# Altium PCB LED_Base_V2.PcbDoc
Units mil, origin at the board's own origin, x right, y up, seen from the top; angles counter-clockwise.
Board outline 1181.1 x 1181.1 mil, 2 copper layers (Top Layer, Bottom Layer); 15 components, 14 nets, 54 pads, 16 vias.
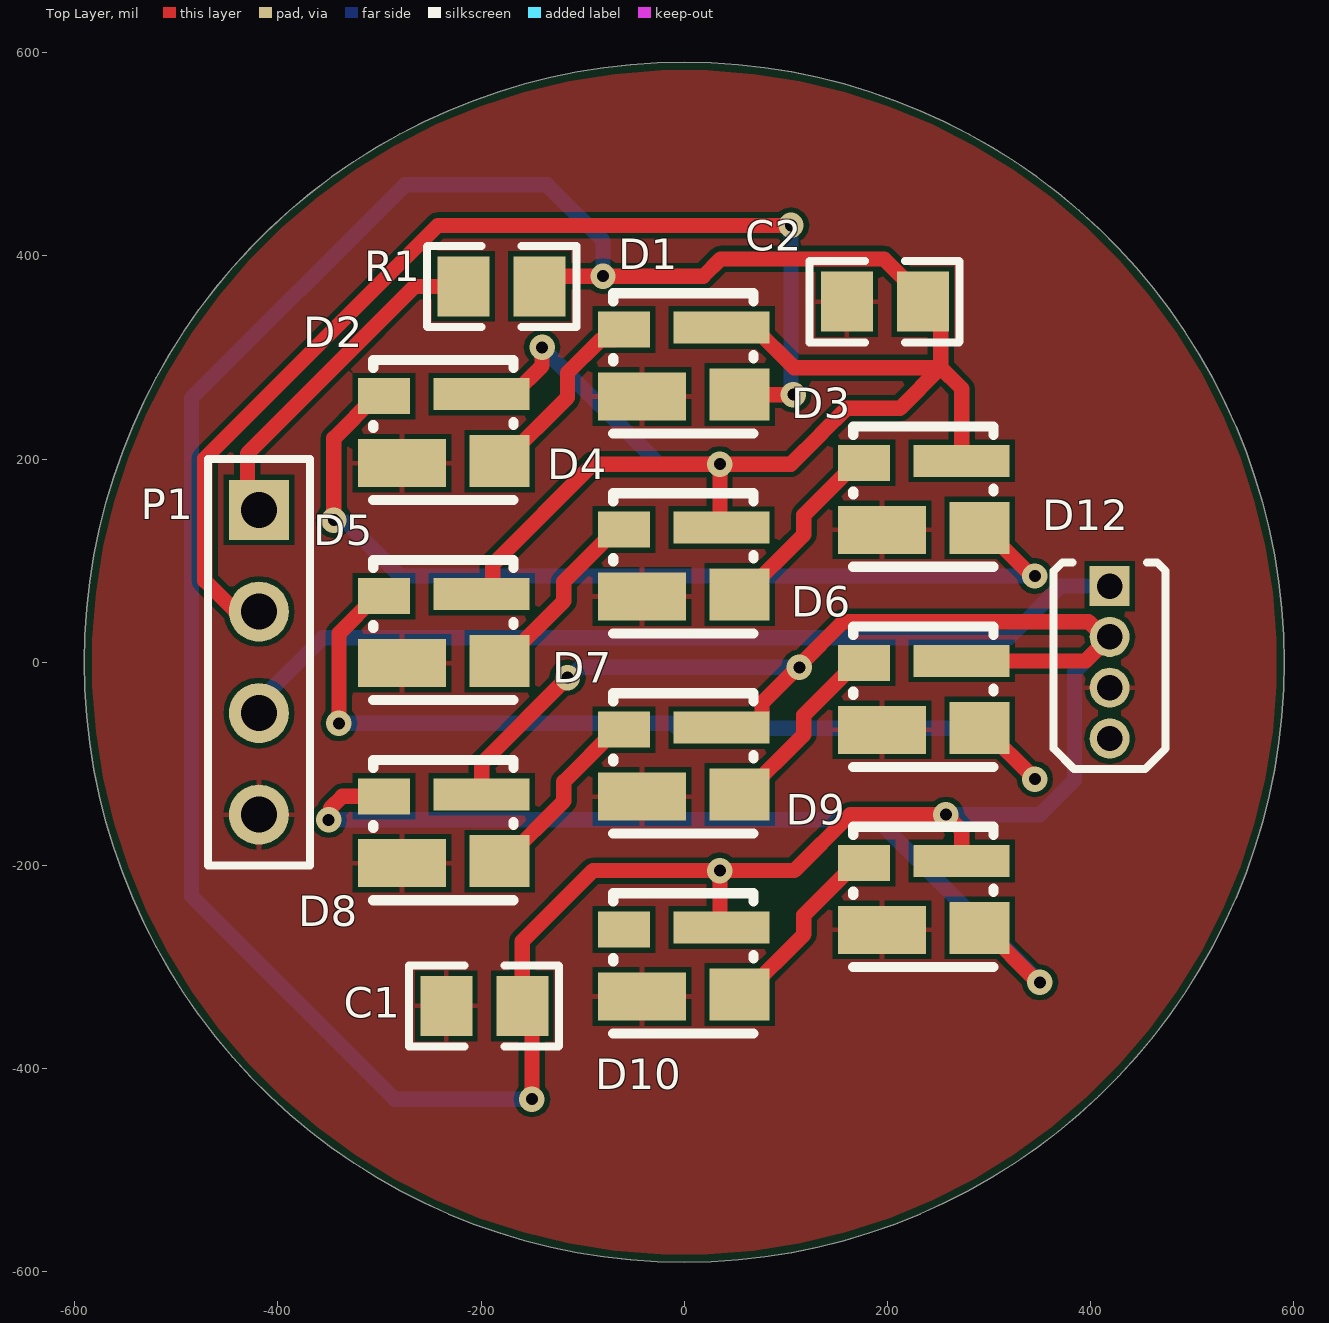
[diagram p0: Top Layer view]
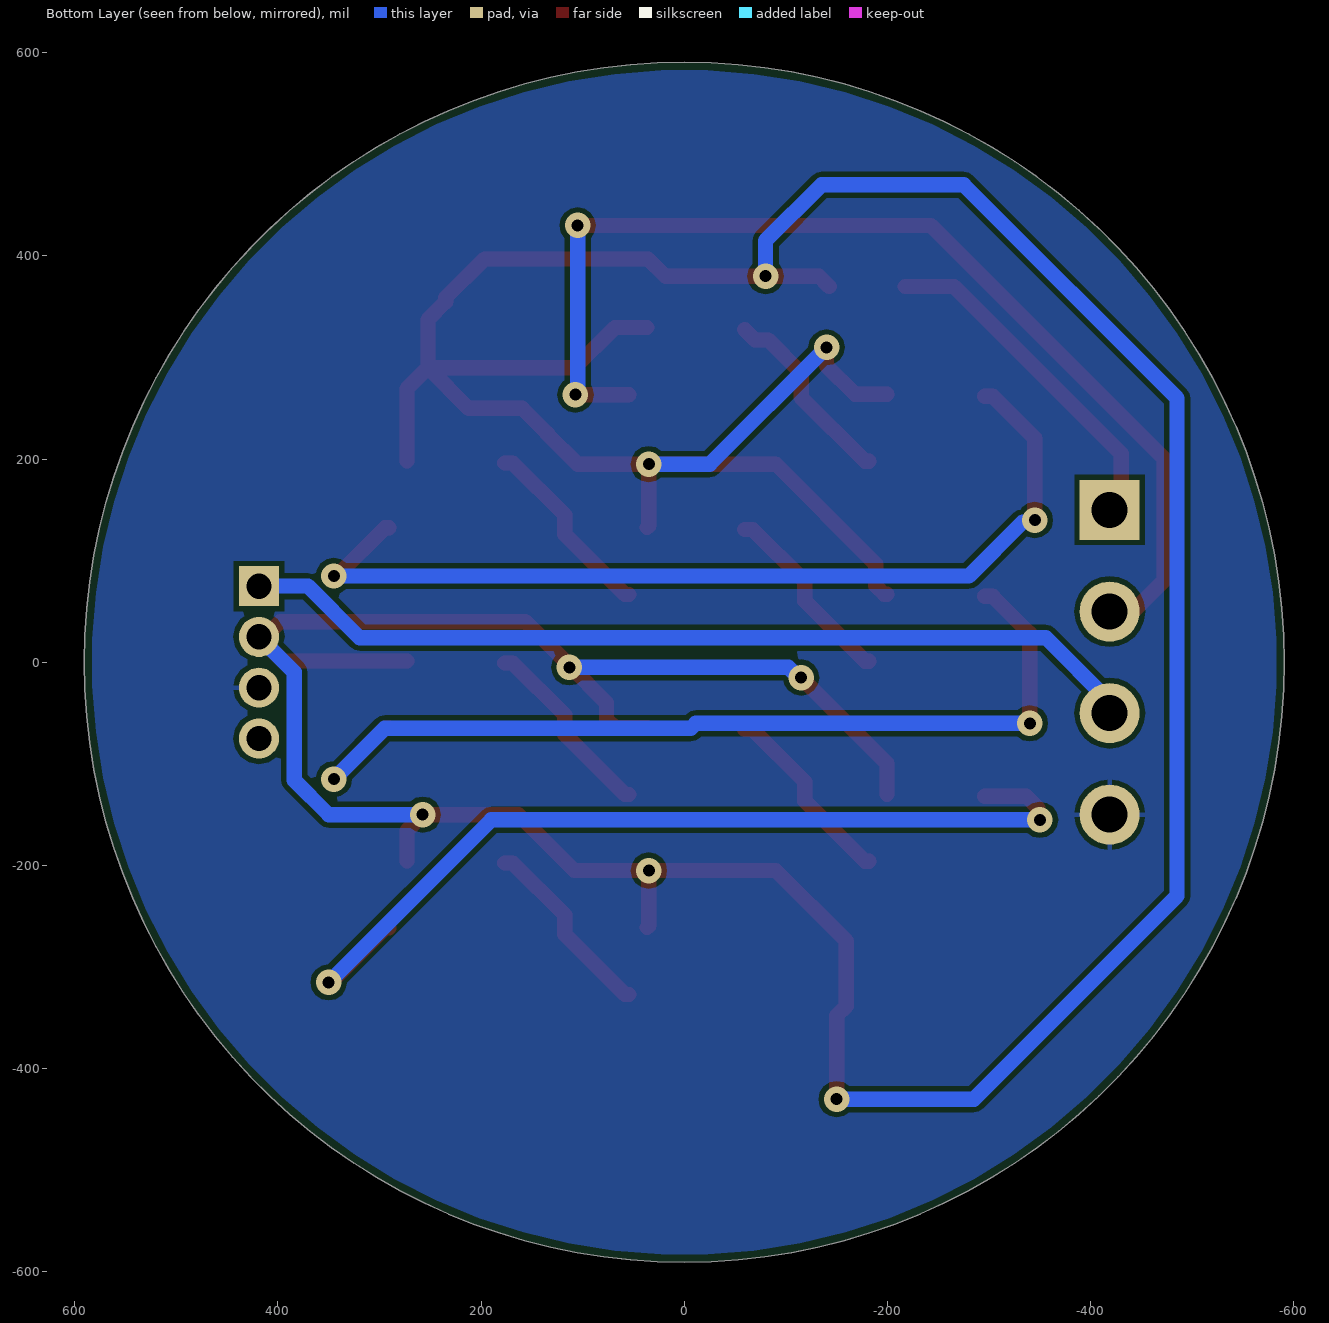
[diagram p1: Bottom Layer view, seen from below]
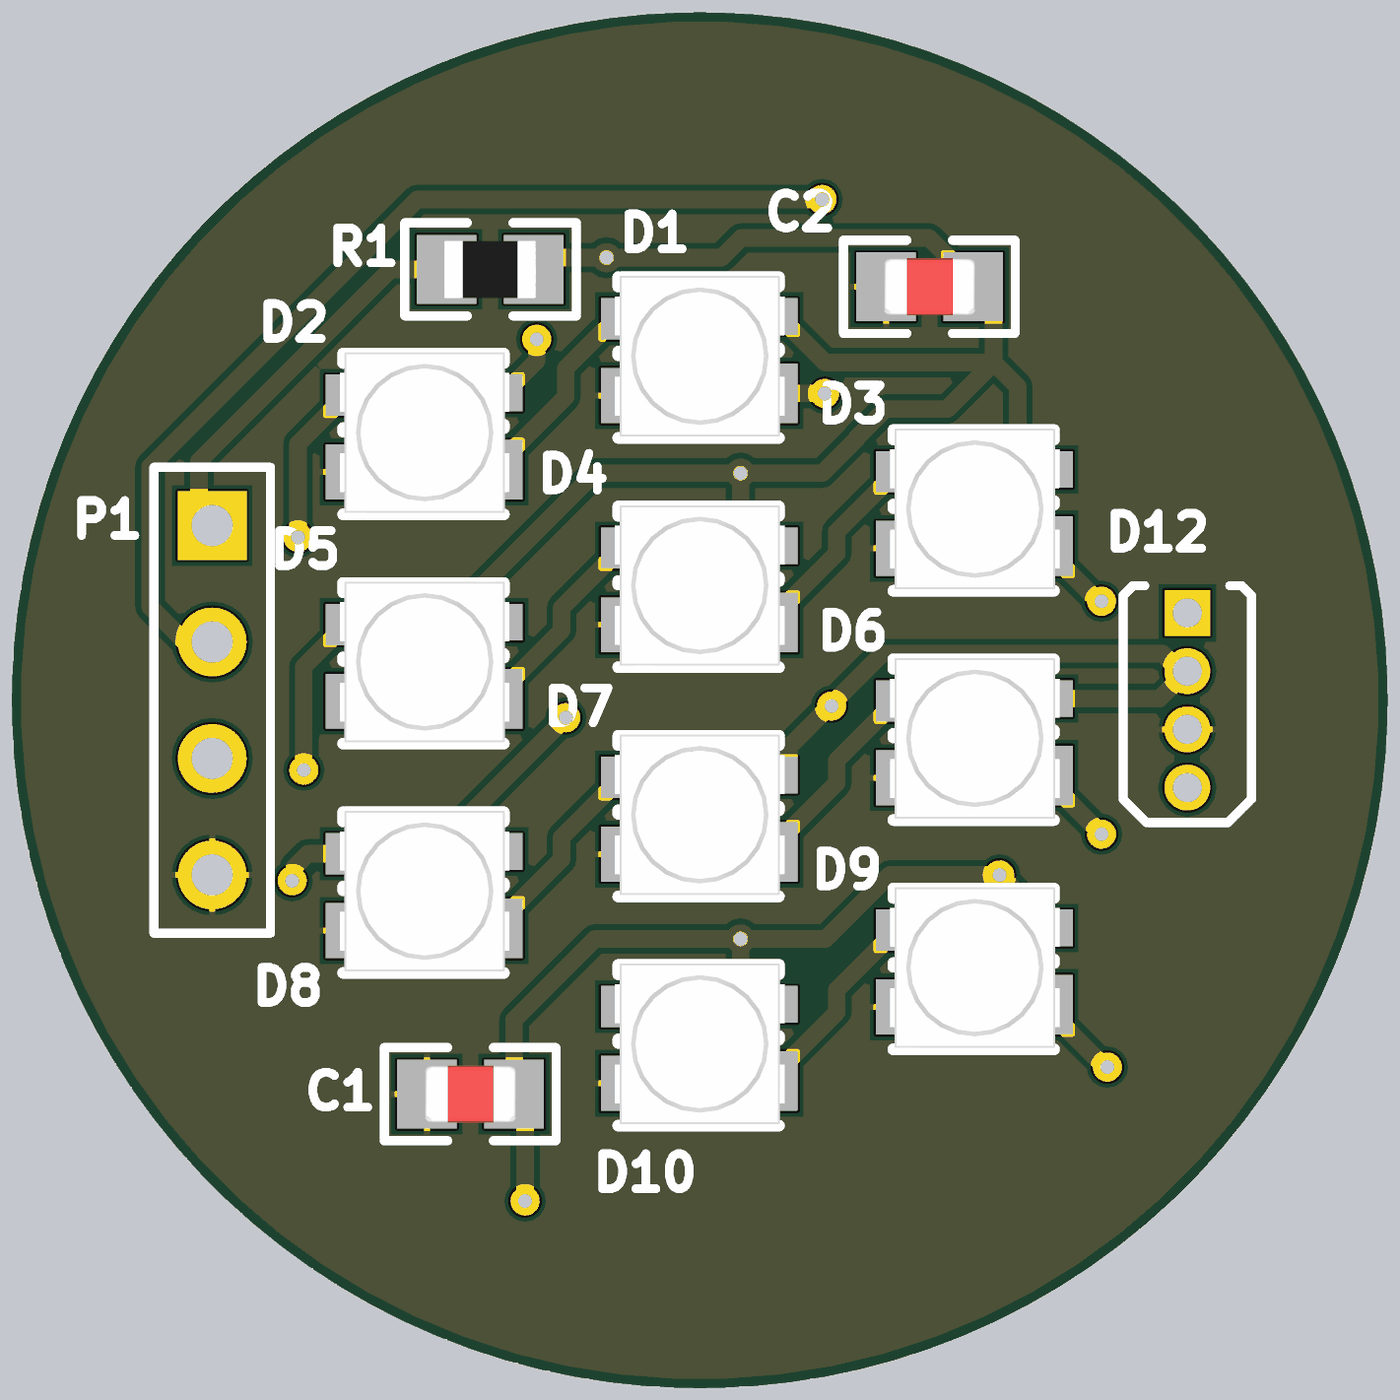
[diagram p2: 3D render of the assembled board from above, using the file's embedded part models]

## Layer stack, top to bottom
Top Solder: solder mask 0.4, Solder Resist, Dk 3.5
Top Layer: signal copper 1.4
Dielectric 1: dielectric 12.6, FR-4, Dk 4.8
Bottom Layer: signal copper 1.4
Bottom Solder: solder mask 0.4, Solder Resist, Dk 3.5

## Board outline
-590.55,0 ccw(c0,0) 0,-590.55 ccw(c0,0) 590.55,0 ccw(c0,0) 0,590.55 ccw(c0,0)

## Design rules (kind name [scope] priority, off if disabled: settings)
BoardOutlineClearance [All] p1: gap=7.87 ignorepadtopadclearanceinfootprint=FALSE
Clearance [All] p1: gap=5 ignorepadtopadclearanceinfootprint=TRUE except(10: Arc-Hole Track-Hole SMDPad-Hole THPad-Hole Via-Hole Fill-Hole Poly-Hole Region-Hole Text-Hole)
ComponentClearance [All] p1: gap=5 collisioncheckmode=3 verticalgap=5 showdistances=TRUE
DiffPairsRouting [All] p1: maxlimit=10 minlimit=5 mostfreqgap=5 toplayer_minwidth=5 toplayer_maxwidth=1000 toplayer_prefwidth=5 bottomlayer_minwidth=5 bottomlayer_maxwidth=1000 bottomlayer_prefwidth=5 maxuncoupledlength=500
Height [All] p1: minheight=0 maxheight=71497.94 prefheight=500
HoleSize [All] p1: absolutevalues=TRUE maxlimit=248.03 minlimit=11.81 maxpercent=80.000 minpercent=20.000
HoleToHoleClearance [All] p1: gap=10 allowstackedmicrovias=FALSE
MinimumAnnularRing [All] p1: minimumring=6
MinimumSolderMaskSliver [All] p1: minsoldermaskwidth=6
PlaneClearance [All] p1: clearance=5
PlaneConnect PlaneConnectPowerPads [InPadClass('PowerPads')] p1: planeconnectstyle=Direct reliefexpansion=20 reliefentries=4 reliefconductorwidth=10 reliefairgap=10
PlaneConnect [All] p2: pad.planeconnectstyle=Relief pad.reliefexpansion=11.81 pad.reliefentries=4 pad.reliefconductorwidth=5 pad.reliefairgap=5 via.planeconnectstyle=Direct via.reliefexpansion=11.81 via.reliefentries=4 via.reliefconductorwidth=5 via.reliefairgap=5
PolygonConnect PolygonConnectPowerPads [All vs (InPadClass('PowerPads'))] p1: connectstyle=Direct reliefconductorwidth=10 reliefentries=4 polygonreliefangle="90 Angle" airgapwidth=10
PolygonConnect [All] p2: thpad.connectstyle=Relief thpad.reliefconductorwidth=5 thpad.reliefentries=4 thpad.polygonreliefangle="90 Angle" thpad.airgapwidth=5 smdpad.connectstyle=Relief smdpad.reliefconductorwidth=5 smdpad.reliefentries=4 smdpad.polygonreliefangle="90 Angle" smdpad.airgapwidth=5 via.connectstyle=Direct via.reliefconductorwidth=5 via.reliefentries=4 via.polygonreliefangle="90 Angle" via.airgapwidth=5
RoomDefinition Sheet1 [InComponentClass('Sheet1')] p1: confinementstyle=ConfineIn formatcopy=TRUE lockcomponents=FALSE outline -500,-495 550,-495 550,540 -500,540
RoutingVias [All] p1: holewidth=11.81 width=23.62 viastyle="Through Hole" minholewidth=11.81 minwidth=23.62 maxholewidth=23.62 maxwidth=259.84
SilkToSilkClearance [All] p1: silktosilkclearance=5
SilkToSolderMaskClearance [IsPad] p1: minsilkscreentomaskgap=5 clearancetoexposedcopper=TRUE
SolderMaskExpansion [All] p1: expansion=2 istentingtop=FALSE
UnRoutedNet [All] p1: checkbadconnections=TRUE
Width Width_10mil [All] p1: maxlimit=1000 minlimit=10 preferedwidth=10 minimp=50.000000 maximp=50.000000 favimp=50.000000
Width Width_6mil [All] p2: maxlimit=1000 minlimit=6 preferedwidth=6 minimp=50.000000 maximp=50.000000 favimp=50.000000
Width Power_20mil [All] p3: maxlimit=1000 minlimit=20 preferedwidth=20 minimp=50.000000 maximp=50.000000 favimp=50.000000
Width Power_12mil [All] p4: maxlimit=1000 minlimit=12 preferedwidth=12 minimp=50.000000 maximp=50.000000 favimp=50.000000
Width Width_5mil [All] p5: maxlimit=1000 minlimit=5 preferedwidth=5 minimp=50.000000 maximp=50.000000 favimp=50.000000
Width [All] p6: maxlimit=10 minlimit=10 preferedwidth=10
19 further rules are at their usual default settings.

## Classes and differential pairs
component class Sheet2: C3 J1 J2 P2 P3

## Components (designator, comment, footprint, x,y, rotation, side; value= is the part's Value field where it differs from the comment)
C1 "47uF" 0805C -196.85,-338.23 r180 top
C2 "47uF" 0805C 197.4,355 r180 top
D1 "Diode_SK6812MINI" SK6812MINI 0,295.28 r0 top
D2 "Diode_SK6812MINI" SK6812MINI -236.22,229.65 r0 top
D3 "Diode_SK6812MINI" SK6812MINI 236.22,164.02 r0 top
D4 "Diode_SK6812MINI" SK6812MINI 0,98.39 r0 top
D5 "Diode_SK6812MINI" SK6812MINI -236.22,32.76 r0 top
D6 "Diode_SK6812MINI" SK6812MINI 236.22,-32.87 r0 top
D7 "Diode_SK6812MINI" SK6812MINI 0,-98.5 r0 top
D8 "Diode_SK6812MINI" SK6812MINI -236.22,-164.13 r0 top
D9 "Diode_SK6812MINI" SK6812MINI 236.22,-229.76 r0 top
D10 "Diode_SK6812MINI" SK6812MINI 0,-295.28 r0 top
D12 "WS2812_Through_Hole_Thin" WS2812_THROUGH_HOLE_SMALLER 418.66,0 r0 top
P1 "Header 4" HDR1X4 -418.66,150 r270 top
R1 "470" 0805 -180,370 r0 top

## Footprints (in the part's own frame and the unit in brackets; to place one, negate y for a bottom-side part, rotate by r counter-clockwise, add the part's x,y. Pads: shape width x height; smd on the part's side, far side on the other; paste and mask are expansions set on the pad)
0805 [mm] "0805 Footprint"
  rect 1.3x1.5 smd: 1(-0.95,0) 2(0.95,0)
  silkscreen extent -1.87,-1.02 1.88,1.02, body extent -1,-0.63 1,0.62, height 0.5
0805C [mm] "0805 Footprint"
  rect 1.3x1.5 smd: 1(-0.95,0) 2(0.95,0)
  silkscreen extent -1.87,-1.02 1.88,1.02, body extent -1,-0.62 1,0.63, height 0.78
HDR1X4 [mm] "Connector; Header; 4 Position"
  rect 1.5x1.5 hole 0.9: 1(0,0)
  round 1.5 hole 0.9: 2(2.54,0) 3(5.08,0) 4(7.62,0)
  silkscreen extent -1.27,-1.27 8.89,1.27
SK6812MINI [mm] "SMD LED 3535"
  rect 1.3x0.9 smd: 1(-1.509,0.82)
  rect 2.2x1.2 smd: 2(-1.059,-0.854)
  rect 1.5x1.3 smd: 3(1.385,-0.804)
  rect 2.4x0.8 smd: 4(0.935,0.87)
  silkscreen extent -1.78,-1.78 1.73,1.73, body extent -1.85,-1.75 1.85,1.75, height 1.1
WS2812_THROUGH_HOLE_SMALLER [mm] "THD, 4-Leads, Dia 5.9mm, Pitch 1.27mm"
  rect 1x1 hole 0.635 paste+0: 1(0,1.905)
  round 1 hole 0.635 paste+0: 2(0,0.635) 3(0,-0.635) 4(0,-1.905)
  silkscreen extent -1.4,-2.67 1.4,2.5

## Part data
C1 C2: library part C, "Capacitor", Reviewed by="RM - 2018/08/05", Revision="July-2002: Re-released for DXP Platform."
D1 D2 D3 D4 D5 D6 D7 D8 D9 D10: "SMD LED 3535", Manufacturer=Adafruit, Package=SMT_LED_5MM0, Part Number=SK6812MINI, Temperature="-40°C to +85°C", Temperature Range High=+85°C, Temperature Range Low=-40°C, ComponentLink1Description=Upverter, ComponentLink1URL=https://upverter.com/upn/revision/c89e73b2d25df682/, ComponentLink2Description=Datasheet, ComponentLink2URL=https://cdn-shop.adafruit.com/product-files/1138/SK6812+LED+datasheet+.pdf, helpURL=https://upverter.com/upn/revision/c89e73b2d25df682/, Ipc Land Pattern Name=SOIC320P540X160-4, Lead Free=yes, RoHS=TRUE, Supplier 1=Digi-Key, Supplier 2=Mouser
D12: "WS2812 Through Hole LED"
P1: "Header, 4-Pin", LatestRevisionDate=17-Jul-2002, LatestRevisionNote="Re-released for DXP Platform.", Publisher="Altium Limited"
R1: library part R, "Resistor", Reviewed by="RM - 2018/08/05"

## Via types
v1: diameter 25, hole 11.81, Top Layer to Bottom Layer, 13 vias
v2: diameter 25, hole 11.81, Top Layer to Bottom Layer, tented both sides, 3 vias

## Nets (pads, with @x,y where several pads share a name; then routed paths per layer and width w, separated by ;. In a path a pad name is that pad's centre, name@x,y a point inside that pad or via, vN(x,y) a via of type N, cw(c..) or ccw(c..) an arc to the next point about the centre after c; other vN are vias at no path point)
DIN_SK6812: D1.3 P1.2 | length 1055
  Top Layer w15: P1.2@-442.03,50.33 -472.03,80.33 -472.03,200.64 -242.67,430 v1(105,430) ; D1.3 54.68,263.47 v1(107.22,263.47)
  Bottom Layer w15: v1(105,430) 105,265.69 v1(107.22,263.47)
DIN_WS2812: D12.1 P1.3 | length 895.7
  Bottom Layer w15: P1.3 -418.66,-38.66 -355.79,24.21 319.57,24.21 370.36,75 D12.1
DOUT1: D1.1 D2.3 | length 190.2
  Top Layer w15: D2.3 -177.76,197.99 -115,260.75 -115,285 -82.66,317.34 -69.63,317.34 D1.1
DOUT2: D2.1 D3.3 | length 933.6
  Top Layer w15: v1(-345,140) -345,220.43 -303.5,261.93 D2.1 ; D3.3 294.69,132.36 340.4,86.65 343.35,86.65 v1(345,85)
  Bottom Layer w15: v1(-345,140) -343.09,138.09 -333.09,138.09 -280,85 v1(345,85)
DOUT3: D3.1 D4.3 | length 187.1
  Top Layer w15: D4.3 58.46,66.73 117.64,125.91 117.64,145 168.94,196.3 D3.1
DOUT4: D4.1 D5.3 | length 187.1
  Top Layer w15: D5.3 -177.76,1.1 -118.58,60.28 -118.58,79.37 -67.28,130.67 D4.1
DOUT5: D5.1 D6.3 | length 931.1
  Top Layer w15: v1(-340,-60) -340,28.54 -303.5,65.04 D5.1 ; D6.3 294.69,-64.53 345,-114.84 v1(345,-115)
  Bottom Layer w15: v1(-340,-60) -11.33,-60 -6.33,-65 295,-65 v1(345,-115)
DOUT6: D6.1 D7.3 | length 187.1
  Top Layer w15: D7.3 58.46,-130.16 117.64,-70.98 117.64,-51.89 168.94,-0.59 D6.1
DOUT7: D7.1 D8.3 | length 187.1
  Top Layer w15: D8.3 -177.76,-195.79 -118.58,-136.61 -118.58,-117.52 -67.28,-66.22 D7.1
DOUT8: D8.1 D9.3 | length 917.4
  Top Layer w15: v1(-350,-155) -348.09,-153.09 -348.09,-143.32 -336.62,-131.85 D8.1 ; D9.3 294.69,-261.42 348.27,-315 v1(350,-315)
  Bottom Layer w15: v1(-350,-155) 190,-155 v1(350,-315)
DOUT9: D9.1 D10.3 | length 187
  Top Layer w15: D10.3 58.46,-326.93 117.64,-267.76 117.64,-248.78 168.94,-197.48 D9.1
GND: C1.2 C2.2 D1.2 D2.2 D3.2 D4.2 D5.2 D6.2 D7.2 D8.2 D9.2 D10.2 D12.3 P1.4
NetP1_1: P1.1 R1.1 | length 321.2
  Top Layer w15: P1.1@-430,165 -430,205.49 -265.49,370 R1.1
VDD: C1.1 C2.1 D1.4 D2.4 D3.4 D4.4 D5.4 D6.4 D7.4 D8.4 D9.4 D10.4 D12.2 R1.2 | length 5214.8
  Top Layer w15: D8.4 -199.41,-99.41 v1(-115,-15) ; D5.4 -196.78,67.01 -188.53,75.26 -188.53,96.47 -90,195 v2(35,195) ; D2.4 -167.91,263.9 -140,291.81 v1(-140,310) ; v1(-150,-430) -150,-347.68 C1.1 -159.45,-274.45 -90,-205 v2(35,-205) ; R1.2 -132.6,380 v2(-80,380) 18.6,380 35.63,397.03 196.71,397.03 234.8,358.94 C2.1 252.34,337.46 252.34,290 ; D10.4 35,-259.21 v2(35,-205) ; D7.4 68.31,-64.25 76.56,-56 76.56,-39.86 v1@113.21,-3.21 ; D4.4 35,134.45 v2(35,195) ; D1.4 68.31,329.53 107.83,290 252.34,290 ; v1(113.21,-4.95) v1@113.21,-3.21 ; D9.4 273.03,-165.52 v1(257.51,-150) 163.31,-150 108.31,-205 v2(35,-205) ; D6.4 395.04,1.38 D12.2 412.69,25 397.69,40 156.42,40 v1@113.21,-3.21 ; D3.4 273.03,269.31 252.34,290 ; v2(35,195) 105,195 135,225 135,225.47 159.53,250 212.34,250 252.34,290
  Bottom Layer w15: v1(-150,-430) -285,-430 -485,-230 -485,260 -275,470 -135,470 -80,415 v2(-80,380) ; v1(-140,310) -25,195 v2(35,195) ; v1(-115,-15) -112.67,-15 -102.62,-4.95 v1(113.21,-4.95) ; v1(257.51,-150) 350,-150 384.01,-115.99 384.01,-9.65 D12.2
pads on no net: D10.1 D12.4

## Polygon pours and split planes (outlines as drawn)
GND on Top Layer "GND_L01_P010" (solid, pour order 10): -590.55,0 ccw(c0,0) 0,-590.55 ccw(c0,0) 590.55,0 ccw(c0,0) 0,590.55 ccw(c0,0)
GND on Bottom Layer "GND_L02_P009" (solid, pour order 9): 0,-590.55 cw(c0,0) -590.55,0 cw(c0,0) 0,590.55 cw(c0,0) 590.55,0 cw(c0,0)

## Silkscreen, mask and mechanical layers (free items; w line width, h text height)
Mechanical 1:
  circle w10: c0,0 r590.55
Mechanical 13:
  circle w10: c0,0 r492.13